# EAGLE board TacitusC (EAGLE 6.5.0)

Size 100 x 80 mm. Coordinates in mm from the lower left corner, seen from the top.
Outline: 0,0 100,0 100,80 0,80 0,0
Copper layers (1*16): Top 0.035mm / dielectric 1.5mm / Bottom 0.035mm
Design rules "default": minimum track width 10mil, minimum drill 24mil, track to track 8mil, track to pad 8mil, pad to pad 8mil, via to via 8mil, smd to smd 8mil, copper to edge 40mil, drill to drill 8mil, minimum pad ring 10mil, minimum via ring 8mil, stop-mask expansion 4mil, vias tented up to drill 0mil, thermal gap 10mil

## Footprints (pad centres in the part's own frame; a part is rotated, then mirrored left to right if it is on the bottom)
JST-2-PTH = drill 0.7 pad 1.448: 1 -1,0; 2 1,0
0805 = smd 0.8 x 1.2: 1 -0.9,0; 2 0.9,0
1X08 = drill 1.016 pad 1.88 square: 1 0,0 | drill 1.016 pad 1.88: 2 2.54,0; 3 5.08,0; 4 7.62,0; 5 10.16,0; 6 12.7,0; 7 15.24,0; 8 17.78,0
2X3_LOCK = drill 1.016 pad 1.88 octagon: 1 0,0; 2 0,2.54; 3 2.54,-0.254; 4 2.54,2.286; 5 5.08,0; 6 5.08,2.54
1X06_LOCK = drill 1.016 pad 1.88: 1 0,0; 2 2.54,-0.254; 3 5.08,0; 4 7.62,-0.254; 5 10.16,0; 6 12.7,-0.254
SML0805 = smd 1.2 x 1.2: A 1.05,0; C -1.05,0
TQFP32-08 = smd 1.27 x 0.559: 1 -4.293,2.8; 2 -4.293,2; 3 -4.293,1.2; 4 -4.293,0.4; 5 -4.293,-0.4; 6 -4.293,-1.2; 7 -4.293,-2; 8 -4.293,-2.8; 17 4.293,-2.8; 18 4.293,-2; 19 4.293,-1.2; 20 4.293,-0.4; 21 4.293,0.4; 22 4.293,1.2; 23 4.293,2; 24 4.293,2.8 | smd 0.559 x 1.27: 9 -2.8,-4.293; 10 -2,-4.293; 11 -1.2,-4.293; 12 -0.4,-4.293; 13 0.4,-4.293; 14 1.2,-4.293; 15 2,-4.293; 16 2.8,-4.293; 25 2.8,4.293; 26 2,4.293; 27 1.2,4.293; 28 0.4,4.293; 29 -0.4,4.293; 30 -1.2,4.293; 31 -2,4.293; 32 -2.8,4.293
SOT23 = smd 1.016 x 1.143: 1 -0.889,-1.016; 2 0.889,-1.016; 3 0,1.016
SOT23-5 = smd 0.69 x 1.2: 1 -0.95,-1.3; 2 0,-1.3; 3 0.95,-1.3; 4 0.95,1.3; 5 -0.95,1.3
SOT23-5' = smd 0.55 x 1.2: 1 -0.95,-1.3; 2 0,-1.3; 3 0.95,-1.3; 4 0.95,1.3; 5 -0.95,1.3
1X05_LOCK = drill 1.016 pad 1.88: 1 0,0.127; 2 2.54,-0.127; 3 5.08,0.127; 4 7.62,-0.127; 5 10.16,0.127
2P-SMD-5.0X3.2 = smd 1.778 x 2.032: 1 -2.159,0; 2 2.159,0

## Placement (x,y rotation side)
ALPHA11  M02JST-PTH-2  [JST-2-PTH]  -33.02,34.29 0 top  (outside the outline)
BETA12  M02JST-PTH-2  [JST-2-PTH]  -21.59,34.29 0 top  (outside the outline)
C1  10uF  [0805]  -21.59,50.8 0 top  (outside the outline)
C3  22pF  [0805]  -26.67,52.07 0 top  (outside the outline)
C4  22pF  [0805]  -30.48,52.07 0 top  (outside the outline)
IMU  MPU-6050  [1X08]  -33.02,27.94 0 top  (outside the outline)
J2  AVR_SPI_PRG_62X3_LOCK  [2X3_LOCK]  -36.83,17.78 0 top  (outside the outline)
JP1  [1X06_LOCK]  -27.94,39.37 0 top  (outside the outline)
LED1  [SML0805]  -16.51,50.8 0 top  (outside the outline)
LIPO  M02JST-PTH-2  [JST-2-PTH]  -54.61,2.54 0 top  (outside the outline)
MICROCONTROLLER  ATMEGA328  [TQFP32-08]  31.75,24.13 0 top
Q1  MOSFET-N-044020001  [SOT23]  -39.37,40.64 0 top  (outside the outline)
Q2  MOSFET-N-044020001  [SOT23]  -21.59,45.72 0 top  (outside the outline)
Q3  MOSFET-P-044021001  [SOT23]  -33.02,45.72 0 top  (outside the outline)
R1  10K  [0805]  -34.29,52.07 0 top  (outside the outline)
R2  10K  [0805]  -38.1,52.07 0 top  (outside the outline)
U2  MIC5205-3.3YM5-1300180P1  [SOT23-5]  -48.26,34.29 0 top  (outside the outline)
U3  MCP73831  [SOT23-5']  -48.26,46.99 0 top  (outside the outline)
ULTRASONIC  US-100  [1X05_LOCK]  -46.99,27.94 0 top  (outside the outline)
X1  16MHz-CRYSTAL  [2P-SMD-5.0X3.2]  -41.91,45.72 0 top  (outside the outline)

## Library data of the parts
ALPHA11 BETA12 LIPO = SparkFun-Connectors; SKU: PRT-09914
C1 C3 C4 R1 R2 = SparkFun-Passives
IMU J2 JP1 ULTRASONIC = SparkFun-Connectors
LED1 = led
MICROCONTROLLER = SparkFun-DigitalIC; PROD_ID: IC-09069
Q1-Q3 U2 X1 = OPL Eagle Library
U3 = SparkFun-PowerIC; PROD_ID: IC-09995

## Nets
GND: C1.1 C3.1 C4.1 IMU.2 J2.6 JP1.5 JP1.6 LED1.C LIPO.1 MICROCONTROLLER.3 MICROCONTROLLER.5 MICROCONTROLLER.21 Q1.2 Q2.2 R1.1 R2.1 U2.2 U3.2 ULTRASONIC.1 ULTRASONIC.2
MC_RX: JP1.3 MICROCONTROLLER.30
MC_TX: JP1.2 MICROCONTROLLER.31
MISO: J2.1
MOSI: J2.4
N$1: C1.2 J2.2 JP1.4 MICROCONTROLLER.4 MICROCONTROLLER.6 MICROCONTROLLER.18 Q3.1 R1.2 U2.5 U3.4
N$2: C4.2 MICROCONTROLLER.8
N$3: C3.2 MICROCONTROLLER.7
N$4: MICROCONTROLLER.15 Q1.1
N$5: LIPO.2 Q3.2 U3.3
N$6: MICROCONTROLLER.12 ULTRASONIC.4
N$7: R2.2 U3.5
N$8: LED1.A U3.1
N$9: MICROCONTROLLER.16 Q2.1
N$10: ALPHA11.2 Q1.3
N$11: BETA12.2 Q2.3
N$12: IMU.3 MICROCONTROLLER.28
N$13: IMU.4 MICROCONTROLLER.27
N$14: MICROCONTROLLER.13 ULTRASONIC.3
RST: J2.5 JP1.1 MICROCONTROLLER.29
SCK: J2.3
V_BATT: ALPHA11.1 BETA12.1 IMU.1 Q3.3 U2.1 U2.3 ULTRASONIC.5

## Tracks (layer width: path | path; a pad name or v marks a point on that pad's centre or on a via)
GND  (19 unrouted)
MC_RX  (1 unrouted)
MC_TX  (1 unrouted)
N$1  (9 unrouted)
N$2  (1 unrouted)
N$3  (1 unrouted)
N$4  (1 unrouted)
N$5  (2 unrouted)
N$6  (1 unrouted)
N$7  (1 unrouted)
N$8  (1 unrouted)
N$9  (1 unrouted)
N$10  (1 unrouted)
N$11  (1 unrouted)
N$12  (1 unrouted)
N$13  (1 unrouted)
N$14  (1 unrouted)
RST  (2 unrouted)
V_BATT  (6 unrouted)